# Altium PCB PCB.PcbDoc
Units mm, origin at the board's own origin, x right, y up, seen from the top; angles counter-clockwise.
Board outline 60 x 74 mm, 2 copper layers (Top Layer, Bottom Layer); 63 components, 44 nets, 200 pads, 25 vias.
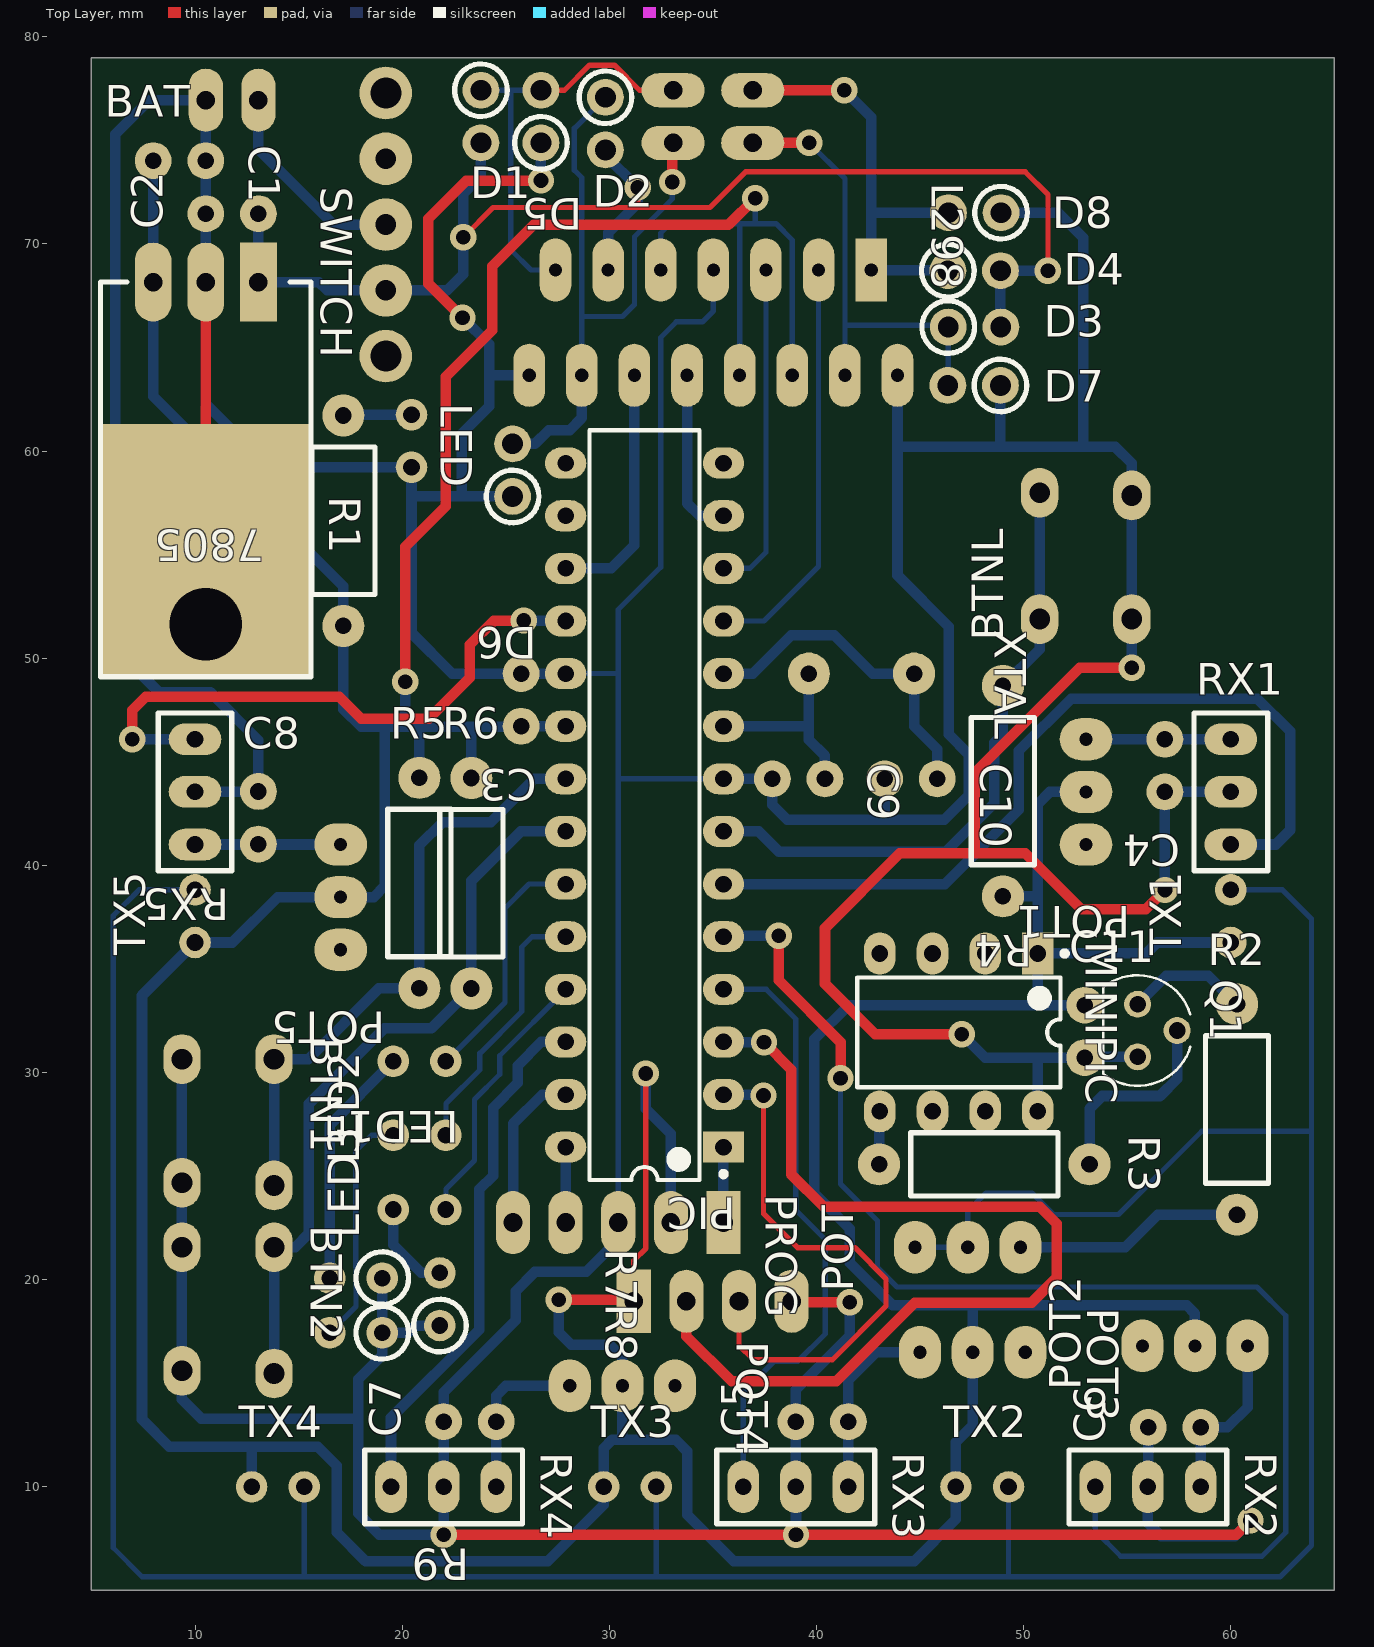
[diagram p0: Top Layer view]
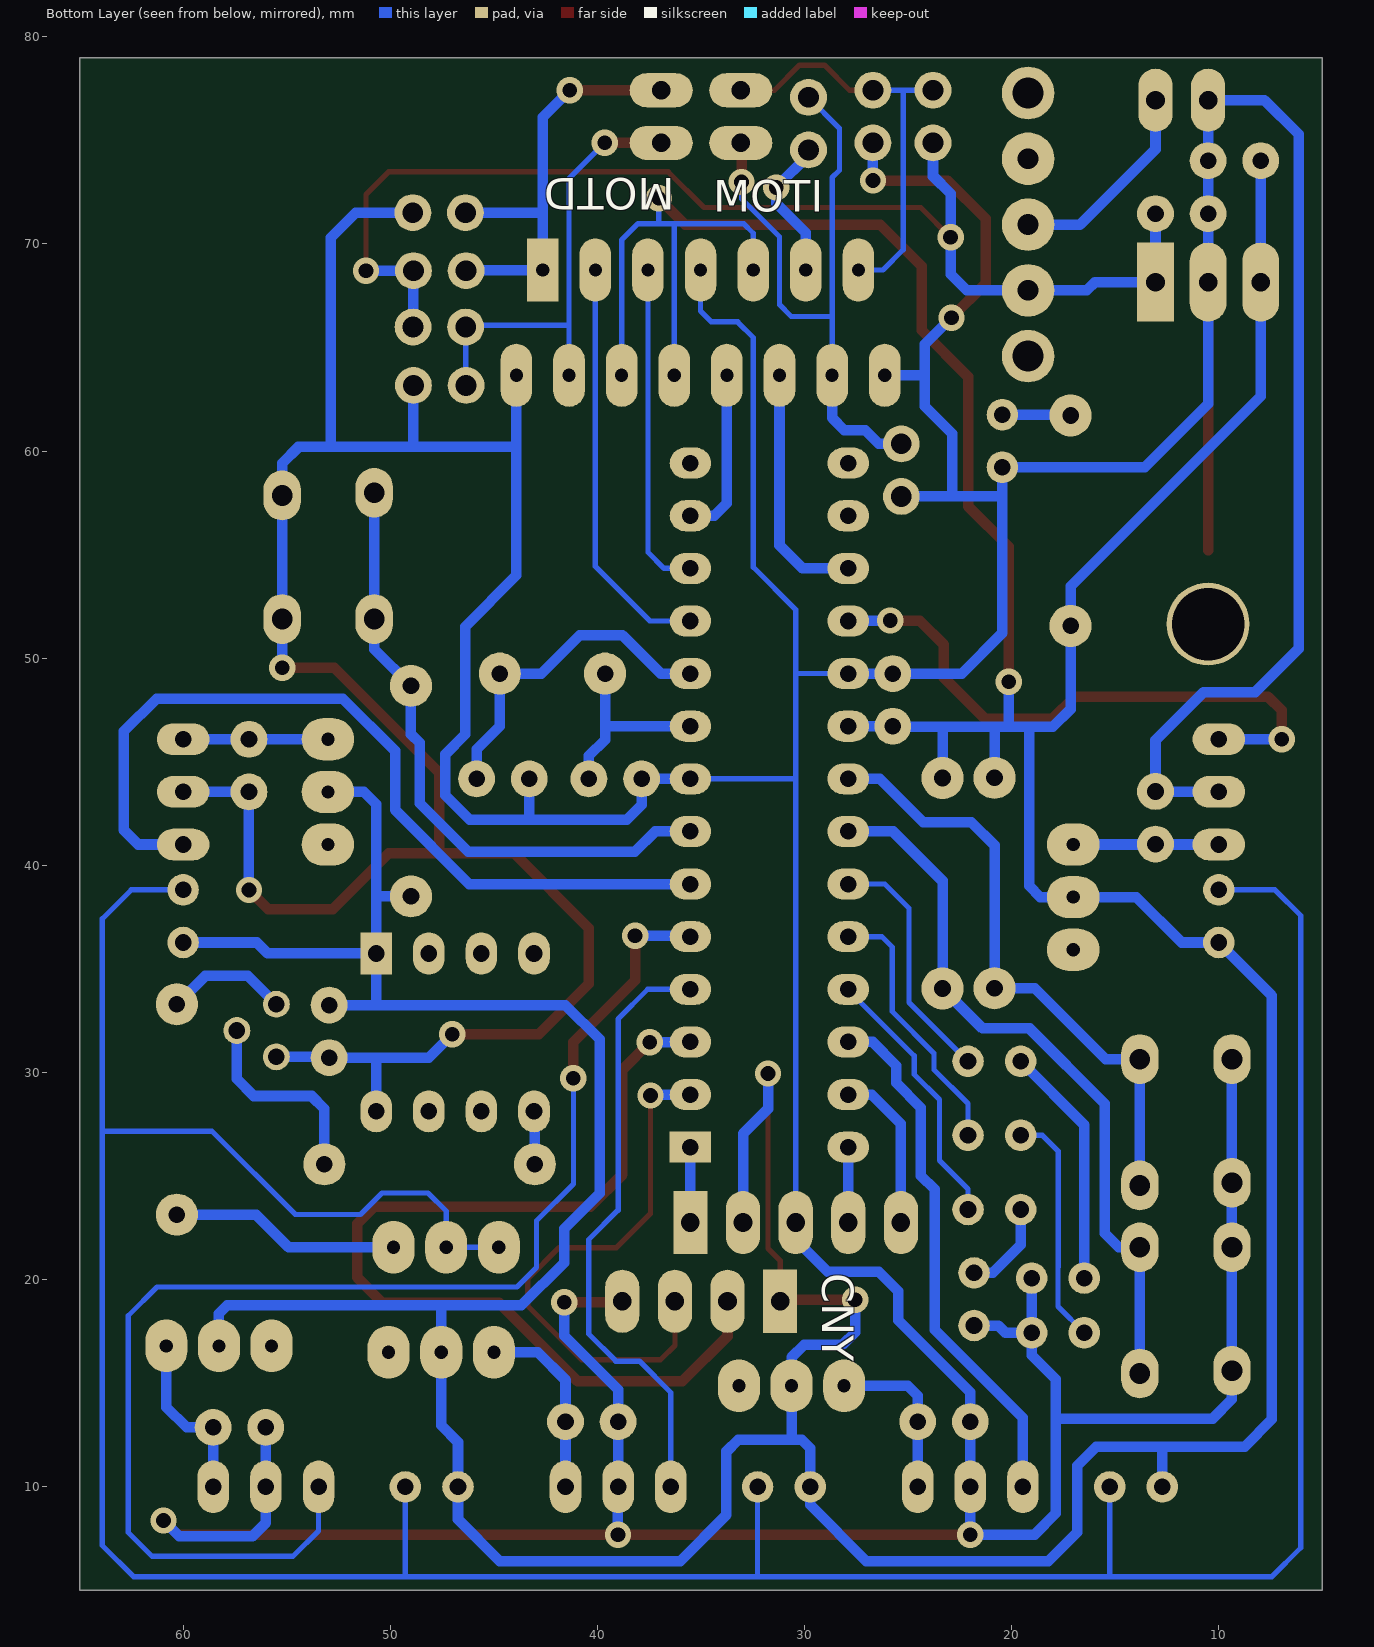
[diagram p1: Bottom Layer view, seen from below]
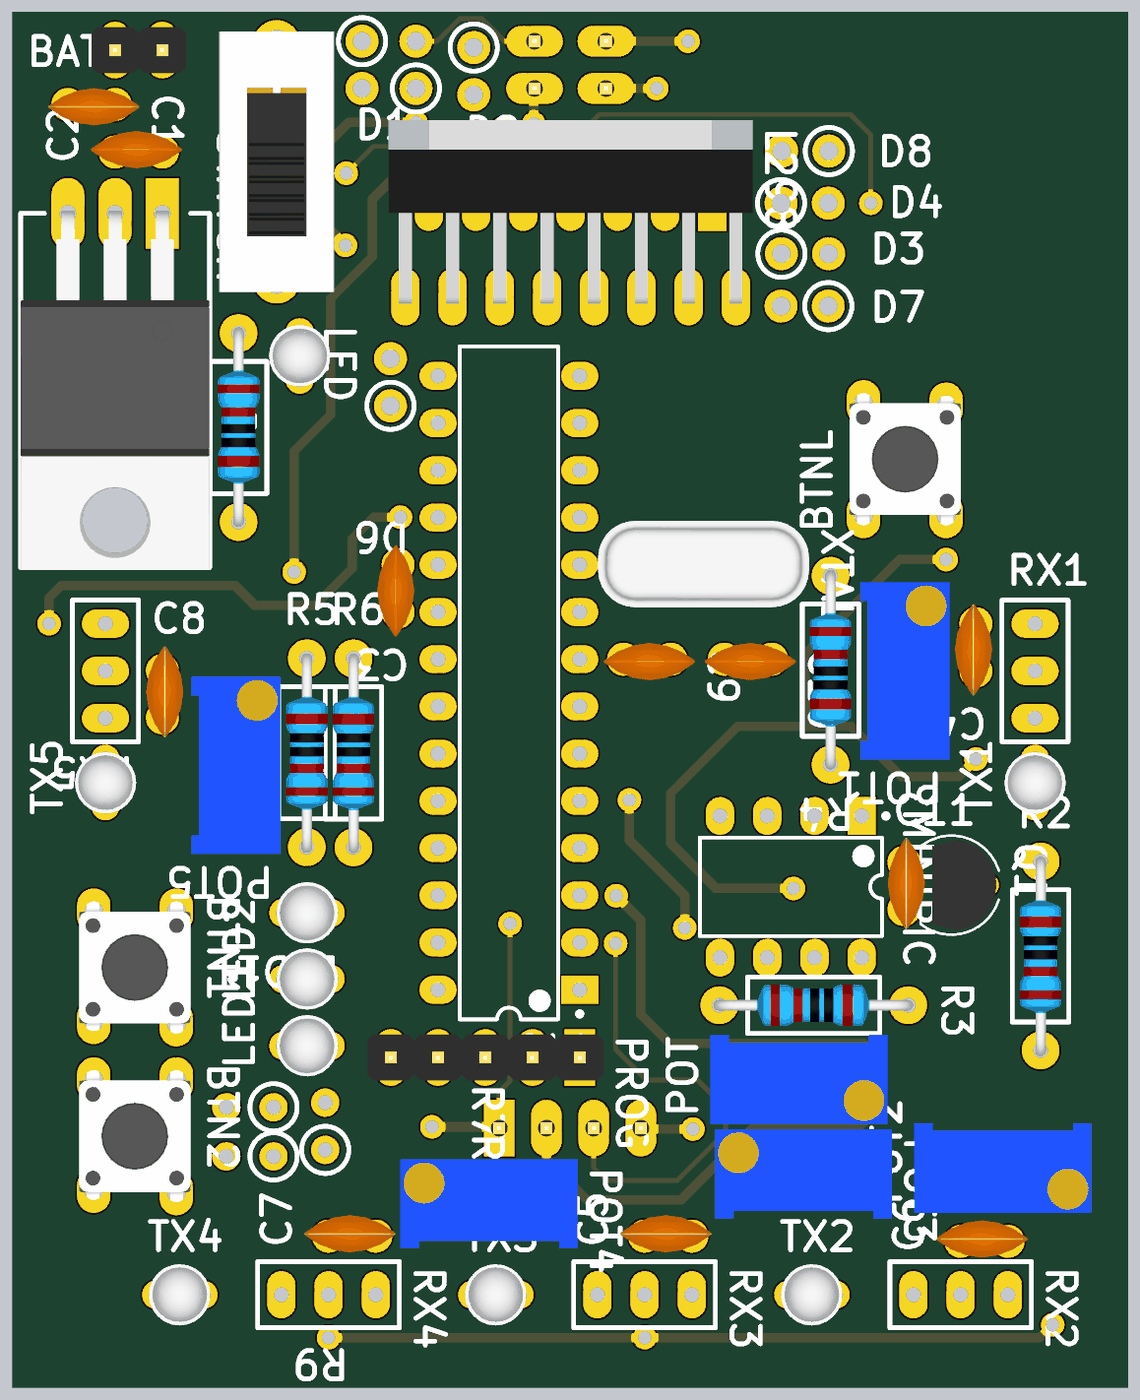
[diagram p2: 3D render of the assembled board from above, using the file's embedded part models]
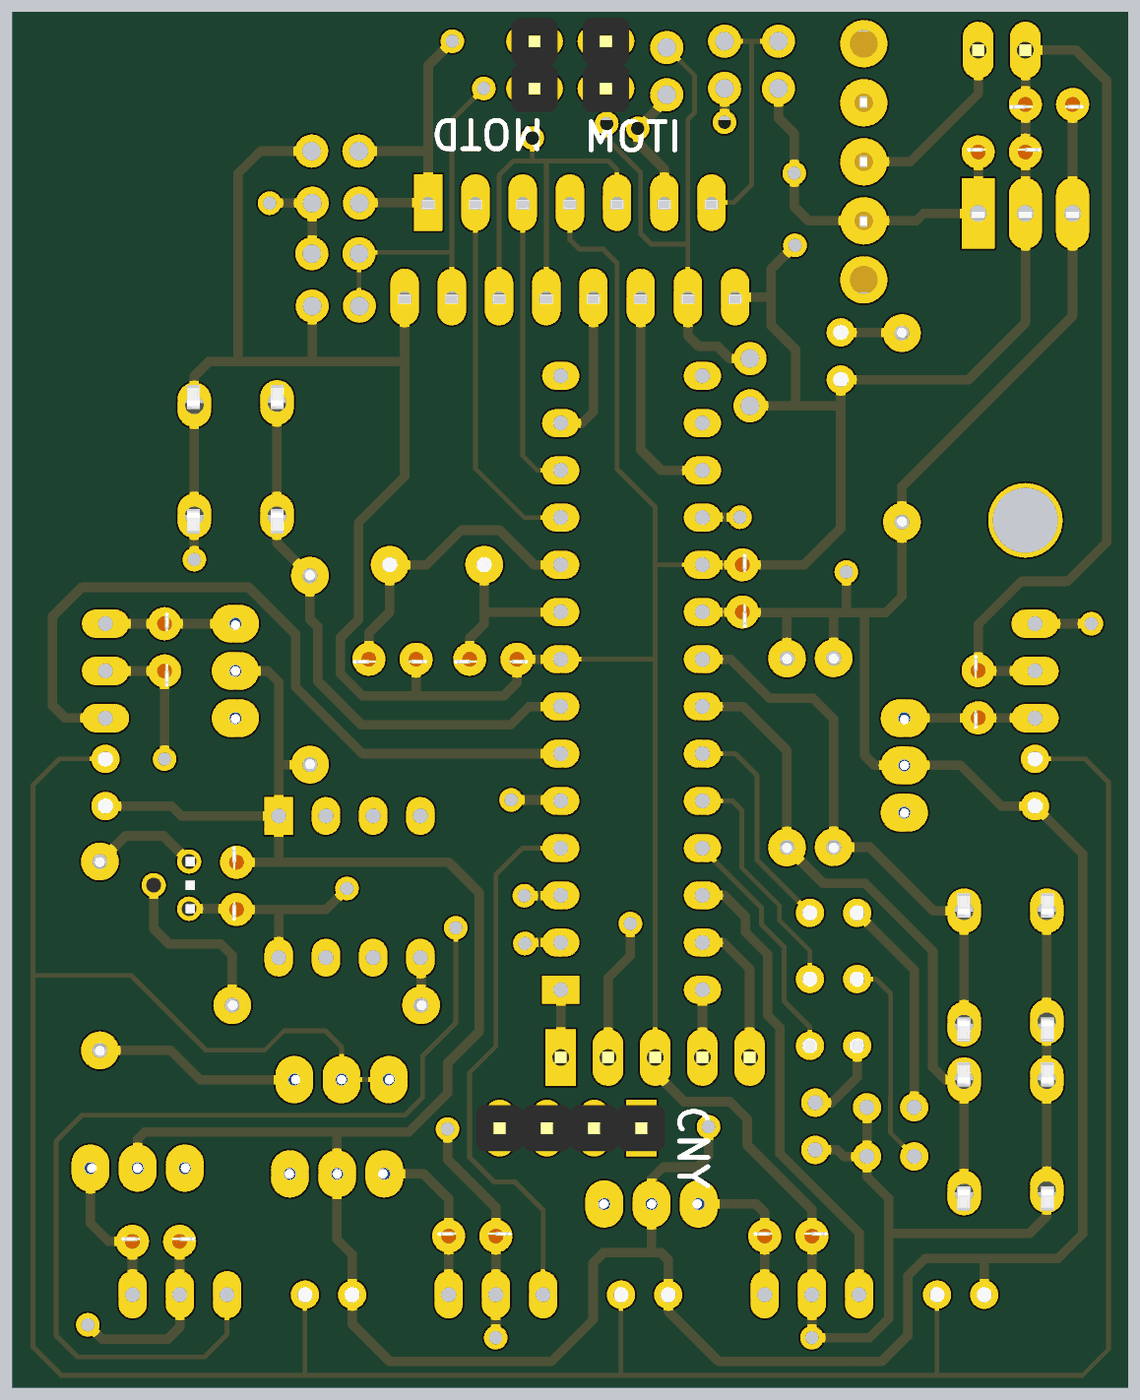
[diagram p3: 3D render of the assembled board from below, using the file's embedded part models]

## Layer stack, top to bottom
Top Solder: solder mask 0.0102, Solder Resist, Dk 3.5
Top Layer: signal copper 0.0356
Dielectric 1: dielectric 0.32, FR-4, Dk 4.8
Bottom Layer: signal copper 0.0356
Bottom Solder: solder mask 0.0102, Solder Resist, Dk 3.5

## Board outline
5,5 65,5 65,79 5,79

## Design rules (kind name [scope] priority, off if disabled: settings)
Clearance [All] p1: gap=0.381
PolygonConnect [All] p1: connectstyle=Relief reliefconductorwidth=0.254 reliefentries=4 polygonreliefangle="90 Angle" airgapwidth=0.254
RoutingVias [All] p1: holewidth=0.711 width=1.27 viastyle="Through Hole" minholewidth=0.711 minwidth=1.27 maxholewidth=0.711 maxwidth=1.27
SolderMaskExpansion [All] p1: expansion=0.102
Width [All] p1: maxlimit=0.762 minlimit=0.254 preferedwidth=0.762
30 further rules are at their usual default settings.

## Components (designator, comment, footprint, x,y, rotation, side; value= is the part's Value field where it differs from the comment)
7805 "LM78XX" TO-220-FLAT 13.06,68.16 r270 top
BAT "Header 1x2" "HEADER 1X2" 11.79,76.94 r270 top
BTN1 "BUTTON_SMALL_4PIN" TACT_SWITCH-SMALL-4PIN 9.37,30.142 r270 top
BTN2 "BUTTON_SMALL_4PIN" TACT_SWITCH-SMALL-4PIN 9.37,21.062 r270 top
BTNL "BUTTON_SMALL_4PIN" TACT_SWITCH-SMALL-4PIN 55.22,52.4 r90 top
C1 "CAP-CER" CAP-CER 9.631,74.02 r0 top
C2 "CAP-CER" CAP-CER 11.409,71.46 r180 top
C3 "CAP-CER" CAP-CER 25.74,47.609 r270 top
C4 "CAP-CER" CAP-CER 56.82,44.439 r270 top
C5 "CAP-CER" CAP-CER 39.889,13.15 r180 top
C6 "CAP-CER" CAP-CER 56.9,12.87 r180 top
C7 "CAP-CER" CAP-CER 22.889,13.15 r180 top
C8 "CAP-CER" CAP-CER 13.06,42.681 r90 top
C9 "CAP-CER" CAP-CER 39.52,44.18 r0 top
C10 "CAP-CER" CAP-CER 44.941,44.18 r0 top
C11 "CAP-CER" CAP-CER 52.95,32.37 r90 top
CNY "Header 1x4" "HEADER 1X4" 31.18,18.96 r270 bottom
D1 "DIODE" "DO-41 RADIAL" 23.8,76.15 r90 top
D2 "DIODE" "DO-41 RADIAL" 29.81,75.81 r90 top
D3 "DIODE" "DO-41 RADIAL" 47.63,65.99 r180 top
D4 "DIODE" "DO-41 RADIAL" 47.61,68.71 r180 top
D5 "DIODE" "DO-41 RADIAL" 26.7,76.15 r270 top
D6 "DIODE" "DO-41 RADIAL" 25.33,59.08 r270 top
D7 "DIODE" "DO-41 RADIAL" 47.61,63.17 r0 top
D8 "DIODE" "DO-41 RADIAL" 47.64,71.51 r0 top
L298 "L298" MULTIWATT15 45.18,68.74 r270 top
LED "LED" LED-3MM-RED 20.45,60.49 r270 top
LED1 "LED" LED-3MM-RED 20.84,30.54 r180 top
LED2 "LED" LED-3MM-YELLOW 20.84,26.98 r180 top
LED3 "LED" LED-3MM-GREEN 20.84,23.39 r180 top
MINIPIC "PIC12F683-I/P" PDIP300-P8 46.87,31.94 r270 top
MOTD "" "HEADER 1X2" 36.92,76.15 r0 bottom
MOTI "" "HEADER 1X2" 33.08,76.15 r180 bottom
PIC "PIC18F2550-I/SP" SPDIP300-SP28 31.7,42.91 r180 top
POT "POT" POT-10TURN 47.3,21.57 r180 top
POT1 "POT" POT-10TURN 53.01,43.55 r270 top
POT2 "POT" POT-10TURN 58.27,16.81 r180 top
POT3 "POT" POT-10TURN 47.54,16.5 r0 top
POT4 "POT" POT-10TURN 30.63,14.88 r0 top
POT5 "POT" POT-10TURN 17.03,38.47 r270 top
PROG "" "HEADER 1X5" 35.51,22.76 r270 top
Q1 "PN2222A" TO-92 56.453,32.03 r270 top
R1 "RES" RES-AXIAL-400MIL 17.16,61.72 r270 top
R2 "RES" RES-AXIAL-400MIL 60.3,23.14 r90 top
R3 "RES" RES-AXIAL-400MIL 43.02,25.57 r0 top
R4 "RES" RES-Axial-400mil 49,48.67 r270 top
R5 "RES" RES-Axial-400mil 20.83,34.07 r90 top
R6 "RES" RES-Axial-400mil 23.34,34.06 r90 top
R7 "RES" RES-RADIAL 17.77,20.08 r0 top
R8 "RES" RES-RADIAL 17.77,17.44 r0 top
R9 "RES" RES-RADIAL 21.82,19.06 r270 top
RX1 "TSSP58038" TSSP58038 60,43.55 r90 top
RX2 "TSSP58038" TSSP58038 56,10 r0 top
RX3 "TSSP58038" TSSP58038 39,10 r0 top
RX4 "TSSP58038" TSSP58038 22,10 r0 top
RX5 "TSSP58038" TSSP58038 10,43.55 r270 top
SWITCH "SLIDE-SWITCH" SWITCH 19.21,70.935 r270 top
TX1 "LED" LED-3MM-YELLOW 60,37.55 r90 top
TX2 "LED" LED-3MM-YELLOW 48,10 r0 top
TX3 "LED" LED-3MM-YELLOW 31,10 r0 top
TX4 "LED" LED-3MM-YELLOW 14,10 r0 top
TX5 "LED" LED-3MM-YELLOW 10,37.55 r90 top
XTAL "XTAL" CRYSTAL-TH 41.662,49.26 r0 top

## Footprints (in the part's own frame and the unit in brackets; to place one, negate y for a bottom-side part, rotate by r counter-clockwise, add the part's x,y. Pads: shape width x height; smd on the part's side, far side on the other; paste and mask are expansions set on the pad)
CAP-CER [mil]
  round 70 hole 31.5: 1(-65,0) 2(35,0)
  body extent -107,-44 87,34, height 207
CRYSTAL-TH [mil]
  round 80 hole 31.5: 1(-80,0) 2(120,0)
  body extent -203,-90 243,93, height 138
"DO-41 RADIAL" [mil]
  round 70 hole 39.37: A(50,0) K(-50,0)
  silkscreen extent 0,-50 100,50, body extent -100,-50 100,50
"HEADER 1X2" [mil]
  oval 120x65 hole 35.43: 1(0,50) 2(0,-50)
  body extent -49,-100 49,100, height 336
"HEADER 1X4" [mil]
  rect 120x65 hole 35.43: 1(0,0)
  oval 120x65 hole 35.43: 2(0,-100) 3(0,-200) 4(0,-300)
  body extent -49,-350 49,50, height 336
"HEADER 1X5" [mil]
  rect 120x65 hole 35.43: 1(0,0)
  oval 120x65 hole 35.43: 2(0,-100) 3(0,-200) 4(0,-300) 5(0,-400)
  body extent -49,-450 49,50, height 336
LED-3MM-GREEN [mil]
  round 60 hole 31.5: A(-50,0) K(50,0)
  body extent -66,-65 64,65, height 217
LED-3MM-RED [mil]
  round 60 hole 31.5: A(-50,0) K(50,0)
  body extent -66,-65 64,65, height 217
LED-3MM-YELLOW [mil]
  round 60 hole 31.5: A(-50,0) K(50,0)
  body extent -66,-65 64,65, height 217
MULTIWATT15 [mil]
  oval 120x60 hole 25: 1(200,-750) 2(0,-700) 3(200,-650) 4(0,-600) 5(200,-550) 6(0,-500) 7(200,-450) 8(0,-400) 9(200,-350) 10(0,-300) 11(200,-250) 12(0,-200) 13(200,-150) 15(200,-50)
  rect 120x60 hole 25: 14(0,-100)
  body extent -175,-786 214,-14, height 831
PDIP300-P8 [mil] "DIP, 8-Leads, Row Spacing 7.62mm, Pitch 2.54mm, Body 9.5x6.6mm"
  rect 80x60 hole 31.5: 1(-150,150)
  oval 80x60 hole 31.5: 2(-150,50) 3(-150,-50) 4(-150,-150) 5(150,-150) 6(150,-50) 7(150,50) 8(150,150)
  silkscreen extent -155,-193 104,206, body extent -140,-193 140,193, height 210
POT-10TURN [mil]
  oval 80x100 hole 25: 1(-100,0) 2(0,0) 3(100,0)
  body extent -188,-94 188,94, height 455
RES-AXIAL-400MIL [mil]
  round 80 hole 31.5: 1(0,0) 2(400,0)
  silkscreen extent 60,-60 340,60, body extent -12,-44 410,44, height 94
RES-Axial-400mil [mil]
  round 80 hole 31.5: 1(0,0) 2(400,0)
  silkscreen extent 60,-60 340,60, body extent -12,-44 410,44, height 94
RES-RADIAL [mil]
  round 60 hole 31.5: 1(-50,0) 2(50,0)
  silkscreen extent 0,-50 100,50, body extent -100,-50 100,50
SPDIP300-SP28 [mm] "DIP, 28-Leads, Row Spacing 7.62mm, Pitch 2.54mm, Body 34.9x6.8mm"
  rect 2x1.5 hole 0.8: 1(-3.81,16.51)
  oval 2x1.5 hole 0.8: 2(-3.81,13.97) 3(-3.81,11.43) 4(-3.81,8.89) 5(-3.81,6.35) 6(-3.81,3.81) 7(-3.81,1.27) 8(-3.81,-1.27) 9(-3.81,-3.81) 10(-3.81,-6.35) 11(-3.81,-8.89) 12(-3.81,-11.43) 13(-3.81,-13.97) 14(-3.81,-16.51) 15(3.81,-16.51) 16(3.81,-13.97) 17(3.81,-11.43) 18(3.81,-8.89) 19(3.81,-6.35) 20(3.81,-3.81) 21(3.81,-1.27) 22(3.81,1.27) 23(3.81,3.81) 24(3.81,6.35) 25(3.81,8.89) 26(3.81,11.43) 27(3.81,13.97) 28(3.81,16.51)
  silkscreen extent -3.94,-18.1 2.65,18.1, body extent -3.55,-18.1 3.55,18.1, height 5.08
SWITCH [mm]
  round 2.54 hole 1: 1(-3.175,0) 2(0,0) 3(3.175,0)
  round 2.54 hole 1.5: 4(-6.35,0) 4(6.35,0)
  body extent -7,-3.1 7,3.1, height 9.65
TACT_SWITCH-SMALL-4PIN [mm]
  oval 2.4x1.8 hole 1: 1(-0.508,4.445) 1(5.588,4.445) 2(-0.508,0) 2(5.461,0)
  body extent -1.45,-0.79 6.53,5.21, height 5.15
TO-92 [mm]
  round 1.3 hole 0.8: B(0,0.953) C(-1.27,-0.953) E(1.27,-0.952)
  silkscreen extent -2.67,-2.6 2.66,1.6, body extent -2.41,-1.97 2.41,1.46, height 7.37
TO-220-FLAT [mm]
  rect 3.81x1.778 hole 0.9: 1(0,0)
  oval 3.81x1.778 hole 0.9: 2(0,-2.54) 3(0,-5.08)
  rect 12.192x10.16 smd: 2(12.954,-2.54)
  round 4 hole 3.5 unplated: ""(16.51,-2.54)
  silkscreen extent 0,-7.62 19.05,2.54, body extent -0.12,-7.62 19.16,2.54, height 4.96
TSSP58038 [mm]
  oval 1.524x2.54 hole 0.8: 1(-2.54,0) 2(0,0) 3(2.54,0)
  silkscreen extent -3.81,-1.78 3.81,1.78

## Part data
MINIPIC: "Flash-Based 8-Bit CMOS Microcontroller with nanoWatt Technology, 2K (x14-Bit words) Program Memory, 384 Bytes Data Memory, 8-Pin PDIP, Industrial Temperature"
MOTD MOTI: library part "Header 1x2"
PIC: "High Performance, Enhanced Flash, USB Microcontroller with nanoWatt Technology, 32K Flash, 28-Pin SPDIP, Industrial Temperature Range"
PROG: library part "Header Programmer"
Q1: library part NPN

## Via types
v1: diameter 1.27, hole 0.711, Top Layer to Bottom Layer, 25 vias

## Nets (pads, with @x,y where several pads share a name; then routed paths per layer and width w, separated by ;. In a path a pad name is that pad's centre, name@x,y a point inside that pad or via, vN(x,y) a via of type N, cw(c..) or ccw(c..) an arc to the next point about the centre after c; other vN are vias at no path point)
38K: MINIPIC.5 R3.1 | length 2.6
  Bottom Layer w0.508: R3.1 43.02,28.09 MINIPIC.5
BAT: 7805.1 C2.1 D1.K D2.K D3.K D4.K L298.4 SWITCH.3 | length 67.1
  Top Layer w0.254: v1(22.95,70.32) 24.39,71.76 31.37,71.76 ; v1(31.37,72.73) 31.37,71.76 ; v1(51.17,68.71) 51.17,72.39 50.08,73.48 36.58,73.48 34.86,71.76 31.37,71.76
  Bottom Layer w0.508: C2.1 7805.1 15.98,68.16 16.38,67.76 SWITCH.3 22.17,67.76 22.95,68.54 v1(22.95,70.32) 22.95,72.43 23.8,73.28 D1.K ; D2.K 29.81,74.29 v1(31.37,72.73) 31.37,71.97 29.94,70.54 L298.4 ; D3.K 48.88,66.01 D4.K v1(51.17,68.71)
BTN1: BTN1.1 PIC.21 R5.1 | length 29.8
  Bottom Layer w0.508: BTN1.1@13.815,24.554 13.815,30.65 15.46,30.65 18.88,34.07 R5.1 20.83,40.97 21.95,42.09 24.28,42.09 26.37,44.18 PIC.21
BTN2: BTN2.1 PIC.22 R6.1 | length 35.2
  Bottom Layer w0.508: BTN2.1@13.815,15.474 13.815,21.57 14.83,21.57 15.5,22.24 15.5,28.49 19.14,32.13 21.41,32.13 R6.1 23.34,39.25 25.73,41.64 PIC.22
BTNL: BTNL.1 PIC.7 R4.1 | length 30.3
  Bottom Layer w0.508: PIC.7 37.21,41.64 38.19,40.66 46.24,40.66 48.58,43 48.58,45.92 49,46.34 R4.1 50.775,50.445 50.775,51.892 BTNL.1@50.775,57.988
CNY1: CNY.2 PIC.3 | length 47.8
  Top Layer w0.508: CNY.2 33.72,17.28 35.9,15.1 40.96,15.1 44.75,18.89 50.38,18.89 51.6,20.11 51.6,22.7 50.78,23.52 40.35,23.52 38.79,25.08 38.79,30.14 v1(37.47,31.46)
  Bottom Layer w0.508: PIC.3 35.53,31.46 v1(37.47,31.46)
CNY2: CNY.3 PIC.2 | length 26.8
  Top Layer w0.254: CNY.3 36.26,16.83 36.95,16.14 40.77,16.14 43.36,18.73 43.36,20.04 41.85,21.55 39.08,21.55 37.44,23.19 v1(37.44,28.89)
  Bottom Layer w0.508: PIC.2 37.39,28.94 v1(37.44,28.89)
DIRD: L298.12 PIC.11 | length 20
  Bottom Layer w0.254: PIC.11 37.47,51.8 40.1,54.43 L298.12
DIRI: L298.5 PIC.17 | length 12
  Bottom Layer w0.508: PIC.17 30.1,54.34 31.21,55.45 L298.5
GND: 7805. 7805.2 BAT.2 BTN1.2 BTN2.2 BTNL.2 C1.2 C2.2 C3.1 C4.2 C5.2 C6.2 C7.2 C8.2 C9.1 C10.1 C11.1 CNY.4 D5.A D6.A D7.A D8.A L298.1 L298.8 L298.15 LED.K MINIPIC.8 PIC.8 PIC.19 PROG.3 Q1.E R7.2 R8.2 R9.2 RX1.2 RX2.2 RX3.2 RX4.2 RX5.2 | length 454
  Top Layer w0.508: 7805.2@10.52,55.206 7805.2@10.52,68.16 ; v1(22,7.69) v1(39.01,7.69) 60.26,7.69 v1(60.95,8.38) ; v1(22.91,66.44) 21.26,68.09 21.26,71.22 23.1,73.06 v1(26.7,73.06) ; CNY.4 38.85,18.91 v1(41.6,18.91) ; v1(47.01,31.85) 42.84,31.85 40.41,34.28 40.41,36.97 44.02,40.58 47.63,40.58 ; v1(55.22,49.54) 52.7,49.54 47.63,44.47 47.63,40.58 ; v1(56.82,38.81) 55.89,37.88 52.78,37.88 50.08,40.58 47.63,40.58
  Bottom Layer w0.254: PIC.19 30.43,49.26 ; PROG.3 30.43,44.18 ; L298.8 35.02,66.76 34.5,66.24 33.23,66.24 32.48,65.49 32.48,54.4 30.43,52.35 30.43,49.26 ; PIC.8 30.43,44.18 ; 30.43,44.18 30.43,49.26
  Bottom Layer w0.508: BTN1.2@9.37,30.65 9.37,24.681 9.37,21.57 9.37,15.601 9.37,14.23 10.3,13.3 17.87,13.3 ; RX5.2 13.04,43.55 C8.2 13.06,46.05 10.74,48.37 8.25,48.37 6.15,50.47 6.15,75.29 7.8,76.94 BAT.2 C1.2 C2.2 10.52,68.16 10.52,62.28 13.58,59.22 LED.K 20.45,57.81 ; R7.2 R8.2 ; R9.2 20.65,17.79 20.3,17.44 R8.2 ; v1(22.91,66.44) 24.2,65.15 24.2,63.66 ; D6.A 22.87,57.81 ; L298.1 24.2,63.66 ; v1(26.7,73.06) D5.A ; PIC.19 C3.1 22.41,49.26 20.45,51.22 20.45,57.81 ; PROG.3 30.43,21.93 28.88,20.38 26.41,20.38 25.48,19.45 25.48,18.05 22,14.57 C7.2 RX4.2 v1(22,7.69) 18.9,7.69 17.87,8.72 17.87,13.3 ; PIC.8 C9.1 37.869,42.921 38.58,42.21 43.29,42.21 ; v1(39.01,7.69) 39.01,9.99 RX3.2 C5.2 39,14.69 41.6,17.29 v1(41.6,18.91) ; C10.1 43.29,42.21 ; L298.15 43.91,60.2 ; v1(47.01,31.85) 48.141,30.719 50.68,30.719 ; D7.A 48.88,60.2 ; D8.A 51.66,71.51 52.87,70.3 52.87,60.2 ; MINIPIC.8 50.68,30.719 ; v1(55.22,49.54) 55.22,51.892 55.22,57.861 55.22,59.41 54.43,60.2 52.87,60.2 ; Q1.E 52.991,30.76 C11.1 50.68,30.719 ; C6.2 56.011,10.011 RX2.2 56,8.26 56.65,7.61 60.18,7.61 v1(60.95,8.38) ; v1(56.82,38.81) C4.2 RX1.2 ; 17.87,13.3 17.87,15.19 19.04,16.36 R8.2 ; 20.45,57.81 22.87,57.81 ; 22.87,57.81 22.87,60.83 24.2,62.16 24.2,63.66 ; 43.29,42.21 46.17,42.21 47.354,43.394 47.354,45.356 46.38,46.33 46.38,51.53 43.91,54 43.91,60.2 ; 43.91,60.2 48.88,60.2 ; 48.88,60.2 52.87,60.2
IR1: PIC.6 RX1.1 | length 41.3
  Bottom Layer w0.508: PIC.6 46.19,39.1 49.77,42.68 49.77,45.53 52.29,48.05 61.28,48.05 62.86,46.47 62.86,41.71 62.16,41.01 RX1.1
IR2: PIC.5 RX2.1 | length 64.1
  Top Layer w0.508: v1(38.18,36.61) 38.18,34.45 41.16,31.47 v1(41.16,29.73)
  Bottom Layer w0.254: v1(41.16,29.73) 41.16,24.63 42.94,22.85 42.94,20.6 43.89,19.65 61.26,19.65 62.65,18.26 62.65,7.8 61.5,6.65 54.69,6.65 53.46,7.88 RX2.1
  Bottom Layer w0.508: PIC.5 35.56,36.61 v1(38.18,36.61)
IR3: PIC.4 RX3.1 | length 29.6
  Bottom Layer w0.254: PIC.4 37.57,34.02 39,32.59 39,23.36 40.42,21.94 40.42,17.38 39.11,16.07 37.97,16.07 36.46,14.56 RX3.1
IR4: PIC.26 RX4.1 | length 25.7
  Bottom Layer w0.508: RX4.1 19.46,13.33 23.72,17.59 23.72,24.36 24.39,25.03 24.39,28.31 25.58,29.5 25.58,30.34 26.72,31.48 PIC.26
IR5: PIC.18 RX5.1 | length 29
  Top Layer w0.508: v1(6.97,46.09) 6.97,47.49 7.63,48.15 16.96,48.15 18.03,47.08 21.29,47.08 23.27,49.06 23.27,50.66 24.43,51.82 v1(25.87,51.82)
  Bottom Layer w0.508: v1(6.97,46.09) RX5.1 ; v1(25.87,51.82) 27.87,51.82 PIC.18
LED1: LED1.A PIC.23 | length 12
  Bottom Layer w0.254: LED1.A 24.96,33.39 24.96,37.93 26.13,39.1 PIC.23
LED2: LED2.A PIC.24 | length 12.9
  Bottom Layer w0.254: LED2.A 22.11,28.5 23.75,30.14 23.75,30.93 25.77,32.95 25.77,36.06 26.27,36.56 PIC.24
LED3: LED3.A PIC.25 | length 13
  Bottom Layer w0.254: LED3.A 22.11,24.38 23.49,25.76 23.49,28.7 24.71,29.92 24.71,30.812 PIC.25@27.89,33.992
  Bottom Layer w0.508: PIC.25@27.89,33.992 PIC.25
MCLR: PIC.1 PROG.1 | length 3.6
  Bottom Layer w0.508: PROG.1 PIC.1
NetBAT_1: BAT.1 SWITCH.2 | length 10
  Bottom Layer w0.508: BAT.1 13.06,74.58 16.705,70.935 SWITCH.2
NetC4_1: C4.1 POT1.1 RX1.3 | length 7
  Bottom Layer w0.508: POT1.1 C4.1 RX1.3
NetC5_1: C5.1 POT3.1 RX3.3 | length 9.2
  Bottom Layer w0.508: RX3.3 C5.1 41.54,15.16 42.88,16.5 POT3.1
NetC6_1: C6.1 POT2.1 RX2.3 | length 8.5
  Bottom Layer w0.508: RX2.3 58.551,10.011 C6.1 59.83,12.87 60.81,13.85 POT2.1
NetC7_1: C7.1 POT4.1 RX4.3 | length 8.2
  Bottom Layer w0.508: RX4.3 C7.1 24.54,14.41 25.01,14.88 POT4.1
NetC8_1: C8.1 POT5.1 RX5.3 | length 7
  Bottom Layer w0.508: RX5.3 POT5.1
NetD1_A: D1.A D5.K L298.2 MOTI.1 | length 20.5
  Top Layer w0.254: D5.K 27.83,77.42 29.04,78.63 30.25,78.63 31.46,77.42 MOTI.1
  Bottom Layer w0.254: D1.A 25.24,77.42 ; D5.K 25.24,77.42 ; L298.2 26.22,68.74 25.24,69.72 25.24,77.42
NetD2_A: D2.A D6.K L298.3 MOTI.2 | length 31.5
  Top Layer w0.508: v1(33.04,72.99) 33.04,74.84 MOTI.2
  Bottom Layer w0.254: L298.3 28.67,66.5 ; D2.A 28.31,75.58 28.31,73.56 28.67,73.2 28.67,66.5 ; v1(33.04,72.99) 33.04,72.18 31.21,70.35 31.21,67.07 30.64,66.5 28.67,66.5
  Bottom Layer w0.508: D6.K 26.41,60.35 27.07,61.01 28.08,61.01 28.67,61.6 L298.3
NetD3_A: D3.A D7.K L298.13 MOTD.1 | length 22.5
  Top Layer w0.508: MOTD.1 v1(39.65,74.88)
  Bottom Layer w0.254: v1(39.65,74.88) 41.37,73.16 41.37,66.07 ; L298.13 41.37,66.07 ; D3.A@46.28,66.07 41.37,66.07 ; D7.K@46.36,63.19 D3.A
  Bottom Layer w0.508: D3.A@46.28,66.07 D3.A ; D7.K D7.K@46.36,63.19
NetD4_A: D4.A D8.K L298.14 MOTD.2 | length 21.1
  Top Layer w0.508: MOTD.2 v1(41.34,77.42)
  Bottom Layer w0.508: v1(41.34,77.42) 42.64,76.12 42.64,71.51 ; D4.A 46.31,68.74 L298.14 42.64,71.51 ; D8.K 42.64,71.51
NetLED1_K: LED1.K R7.1 | length 11.7
  Bottom Layer w0.508: R7.1 16.5,27.47 LED1.K
NetLED2_K: LED2.K R8.1 | length 11.4
  Bottom Layer w0.254: R8.1 17.77,18.71 17.77,20.606 17.76,20.616 17.76,26.21 18.53,26.98 LED2.K
NetLED3_K: LED3.K R9.1 | length 4.5
  Bottom Layer w0.508: LED3.K 19.57,21.68 20.92,20.33 R9.1
NetLED_A: LED.A R1.1 | length 3.3
  Bottom Layer w0.508: R1.1 17.2,61.76 LED.A
NetPOT_1: POT.1 R2.1 | length 11.1
  Bottom Layer w0.508: POT.1 54.91,21.57 56.48,23.14 R2.1
NetPOT_2: POT.2 POT.3 TX1.K TX2.K TX3.K TX4.K TX5.K | length 165.1
  Bottom Layer w0.254: TX5.K 7.29,38.82 6.05,37.58 6.05,7.06 7.452,5.658 15.27,5.658 ; TX4.K 15.27,5.658 ; TX3.K 32.27,5.658 ; POT.3 POT.2 47.3,23.31 48.18,24.19 50.4,24.19 51.44,23.15 54.58,23.15 58.6,27.17 63.9,27.17 ; TX2.K 49.27,5.658 ; TX1.K 62.5,38.82 63.9,37.42 63.9,27.17 ; 15.27,5.658 32.27,5.658 ; 32.27,5.658 49.27,5.658 ; 49.27,5.658 62.378,5.658 63.9,7.18 63.9,27.17
NetQ1_B: Q1.B R3.2 | length 9.8
  Bottom Layer w0.508: R3.2 53.18,28.25 53.8,28.87 56.58,28.87 57.405,29.695 Q1.B
NetQ1_C: Q1.C R2.2 | length 5.9
  Bottom Layer w0.508: Q1.C 56.88,34.68 58.92,34.68 R2.2
PGC: PIC.27 PROG.5 | length 7.9
  Bottom Layer w0.508: PROG.5 25.35,27.53 26.76,28.94 PIC.27
PGD: PIC.28 PROG.4 | length 3.6
  Bottom Layer w0.508: PROG.4 PIC.28
PWMD: L298.10 PIC.12 | length 16
  Bottom Layer w0.254: PIC.12 36.78,54.34 37.56,55.12 L298.10
PWMI: L298.7 PIC.13 | length 8.2
  Bottom Layer w0.508: L298.7 33.75,57.49 34.36,56.88 PIC.13
VCC: 7805.3 C1.1 C3.2 C11.2 CNY.1 L298.6 L298.9 L298.11 MINIPIC.1 PIC.20 POT1.2 POT2.2 POT3.2 POT4.2 POT5.2 PROG.2 R1.2 R4.2 R5.2 R6.2 TX1.A TX2.A TX3.A TX4.A TX5.A | length 315.5
  Top Layer w0.254: CNY.1 31.18,20.926 31.764,21.509 v1(31.764,29.96)
  Top Layer w0.508: v1(20.15,48.87) 20.15,55.38 22.11,57.34 22.11,63.59 24.35,65.83 24.35,68.92 26.35,70.92 35.75,70.92 v1(37.04,72.21) ; v1(27.56,19.03) 31.11,19.03 CNY.1
  Bottom Layer w0.254: L298.6 32.48,70.52 32.94,70.98 36.29,70.98 ; L298.9 36.29,70.98 ; v1(37.04,72.21) 37.04,70.98 ; L298.11 38.83,70.19 38.04,70.98 37.04,70.98 ; 36.29,70.98 37.04,70.98
  Bottom Layer w0.508: C1.1 7805.3 7.98,62.65 17.16,53.47 R1.2 17.16,47.55 18.02,46.69 19.16,46.69 ; TX4.A 12.73,11.94 ; v1(20.15,48.87) 20.15,46.69 ; R5.2 20.83,46.69 ; R6.2 23.34,46.69 ; v1(27.56,19.03) 27.56,17.47 28.17,16.86 30.02,16.86 30.63,16.25 POT4.2 30.63,12.27 ; PIC.20 C3.2 25.71,46.69 23.34,46.69 ; v1(31.764,29.96) 31.764,28.247 32.97,27.04 PROG.2 ; R4.2 50.68,38.51 ; C11.2 50.68,33.259 ; POT1.2 51.27,43.55 50.68,42.96 50.68,38.51 ; POT2.2 58.27,18.36 57.87,18.76 47.54,18.76 ; TX1.A 56.44,36.28 55.91,35.75 MINIPIC.1 ; 12.73,11.94 8.76,11.94 7.44,13.26 7.44,33.72 TX5.A 11.8,36.28 13.99,38.47 POT5.2 18.62,38.47 19.16,39.01 19.16,46.69 ; 12.73,11.94 15.92,11.94 16.84,11.02 16.84,7.81 18.23,6.42 27.02,6.42 29.73,9.13 TX3.A 29.73,11.87 30.13,12.27 30.63,12.27 ; 19.16,46.69 20.15,46.69 ; 20.15,46.69 20.83,46.69 ; 20.83,46.69 23.34,46.69 ; 30.63,12.27 33.21,12.27 33.77,11.71 33.77,8.66 36.01,6.42 44.72,6.42 46.73,8.43 TX2.A 46.73,12.16 47.54,12.97 POT3.2 47.54,18.76 ; 47.54,18.76 43.67,18.76 41.6,20.83 41.6,22.46 39.89,24.17 39.89,31.6 41.549,33.259 50.68,33.259 ; 50.68,33.259 MINIPIC.1 ; MINIPIC.1 50.68,38.51
XTAL1: C9.2 PIC.9 XTAL.1 | length 9.5
  Bottom Layer w0.508: PIC.9 39.63,46.72 ; XTAL.1 39.63,46.72 ; C9.2 40.409,45.291 39.63,46.07 39.63,46.72
XTAL2: C10.2 PIC.10 XTAL.2 | length 16.3
  Bottom Layer w0.508: PIC.10 36.93,49.26 38.79,51.12 40.86,51.12 42.72,49.26 XTAL.2 44.71,46.72 45.83,45.6 C10.2
pads on no net: MINIPIC.2 MINIPIC.3 MINIPIC.4 MINIPIC.6 MINIPIC.7 PIC.14 PIC.15 PIC.16 POT1.3 POT2.3 POT3.3 POT4.3 POT5.3 SWITCH.1 SWITCH.4

## Silkscreen, mask and mechanical layers (free items; w line width, h text height)
Mechanical 1:
  the board outline again, w0.254